# Altium PCB RF Main Board.PcbDoc
Units mil, origin at the board's own origin, x right, y up, seen from the top; angles counter-clockwise.
Board outline 5807 x 3532 mil, 2 copper layers (Top Layer, Bottom Layer); 30 components, 51 nets, 181 pads, 0 vias.
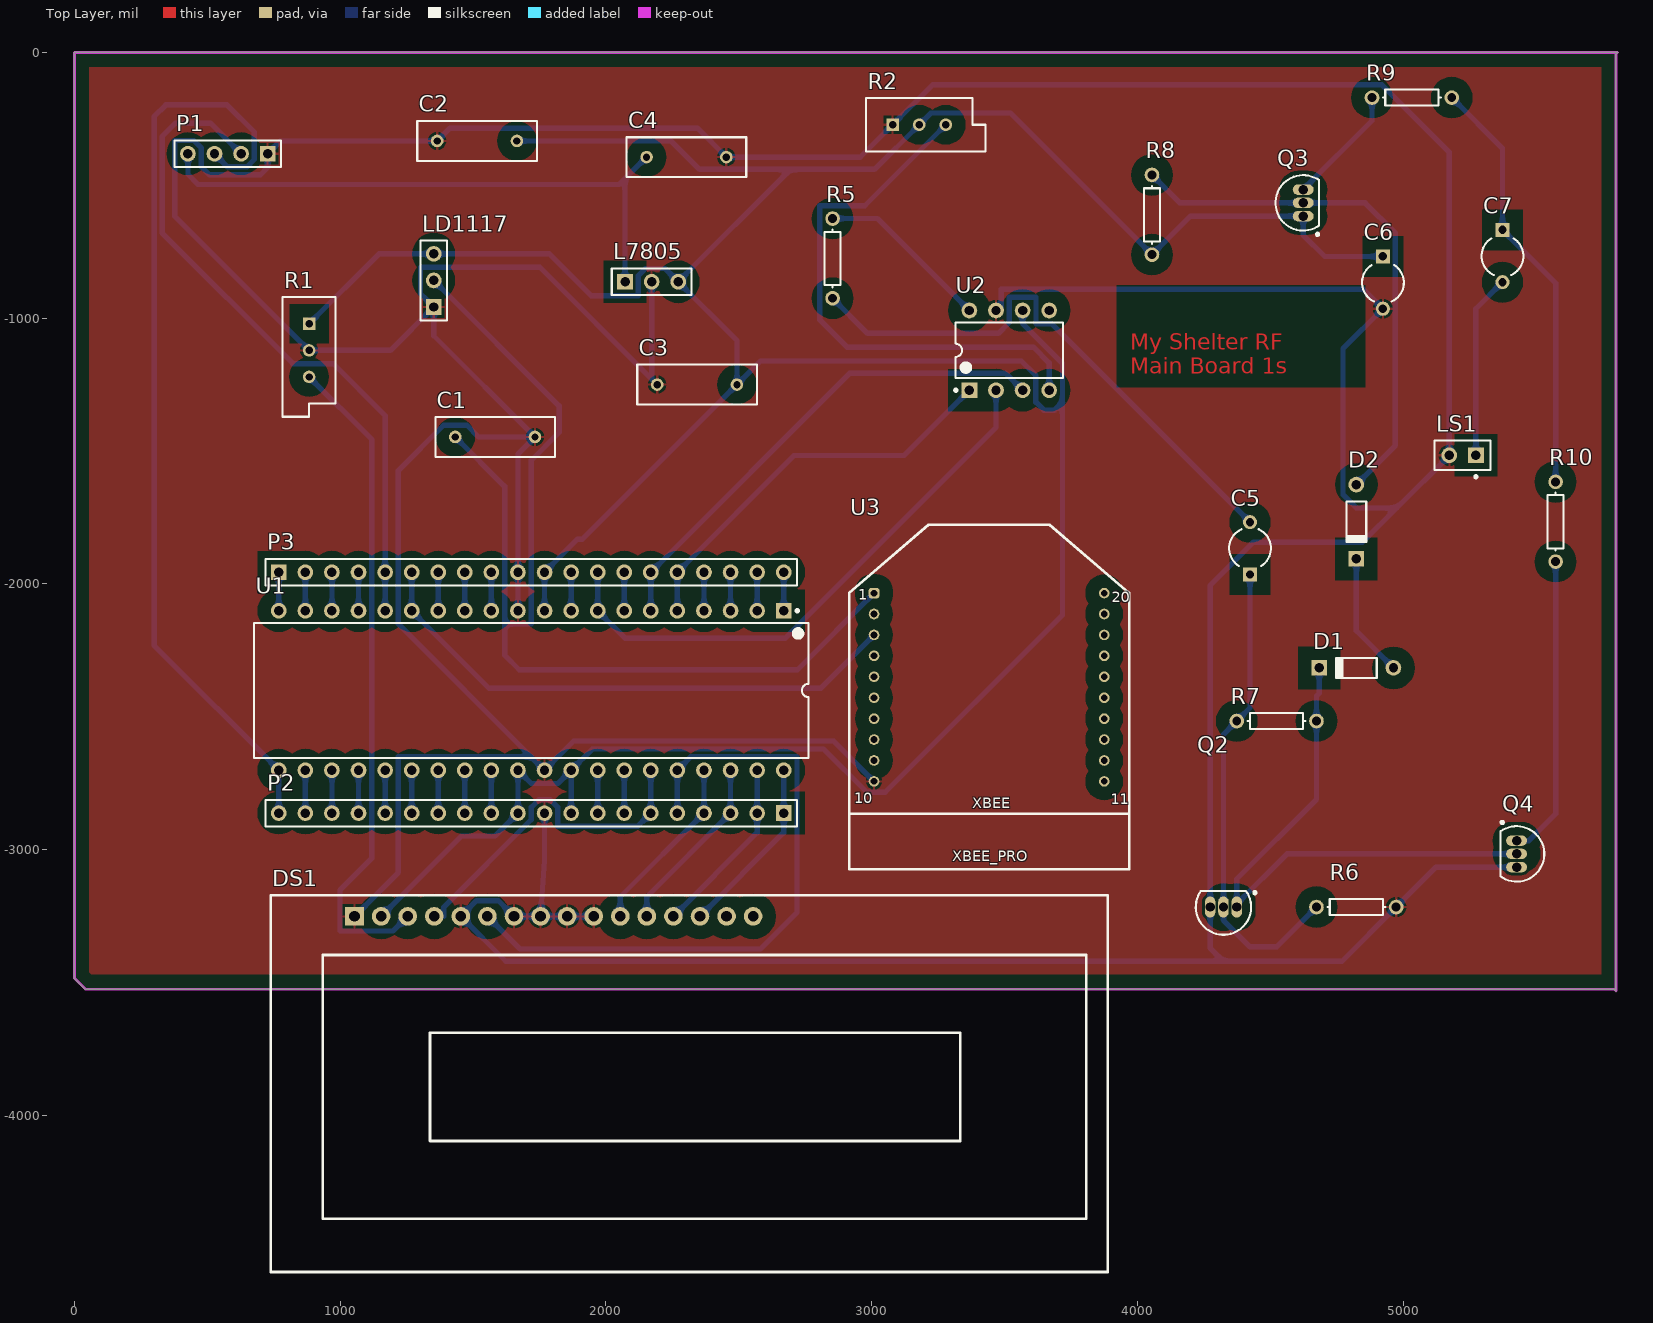
[diagram p0: Top Layer view]
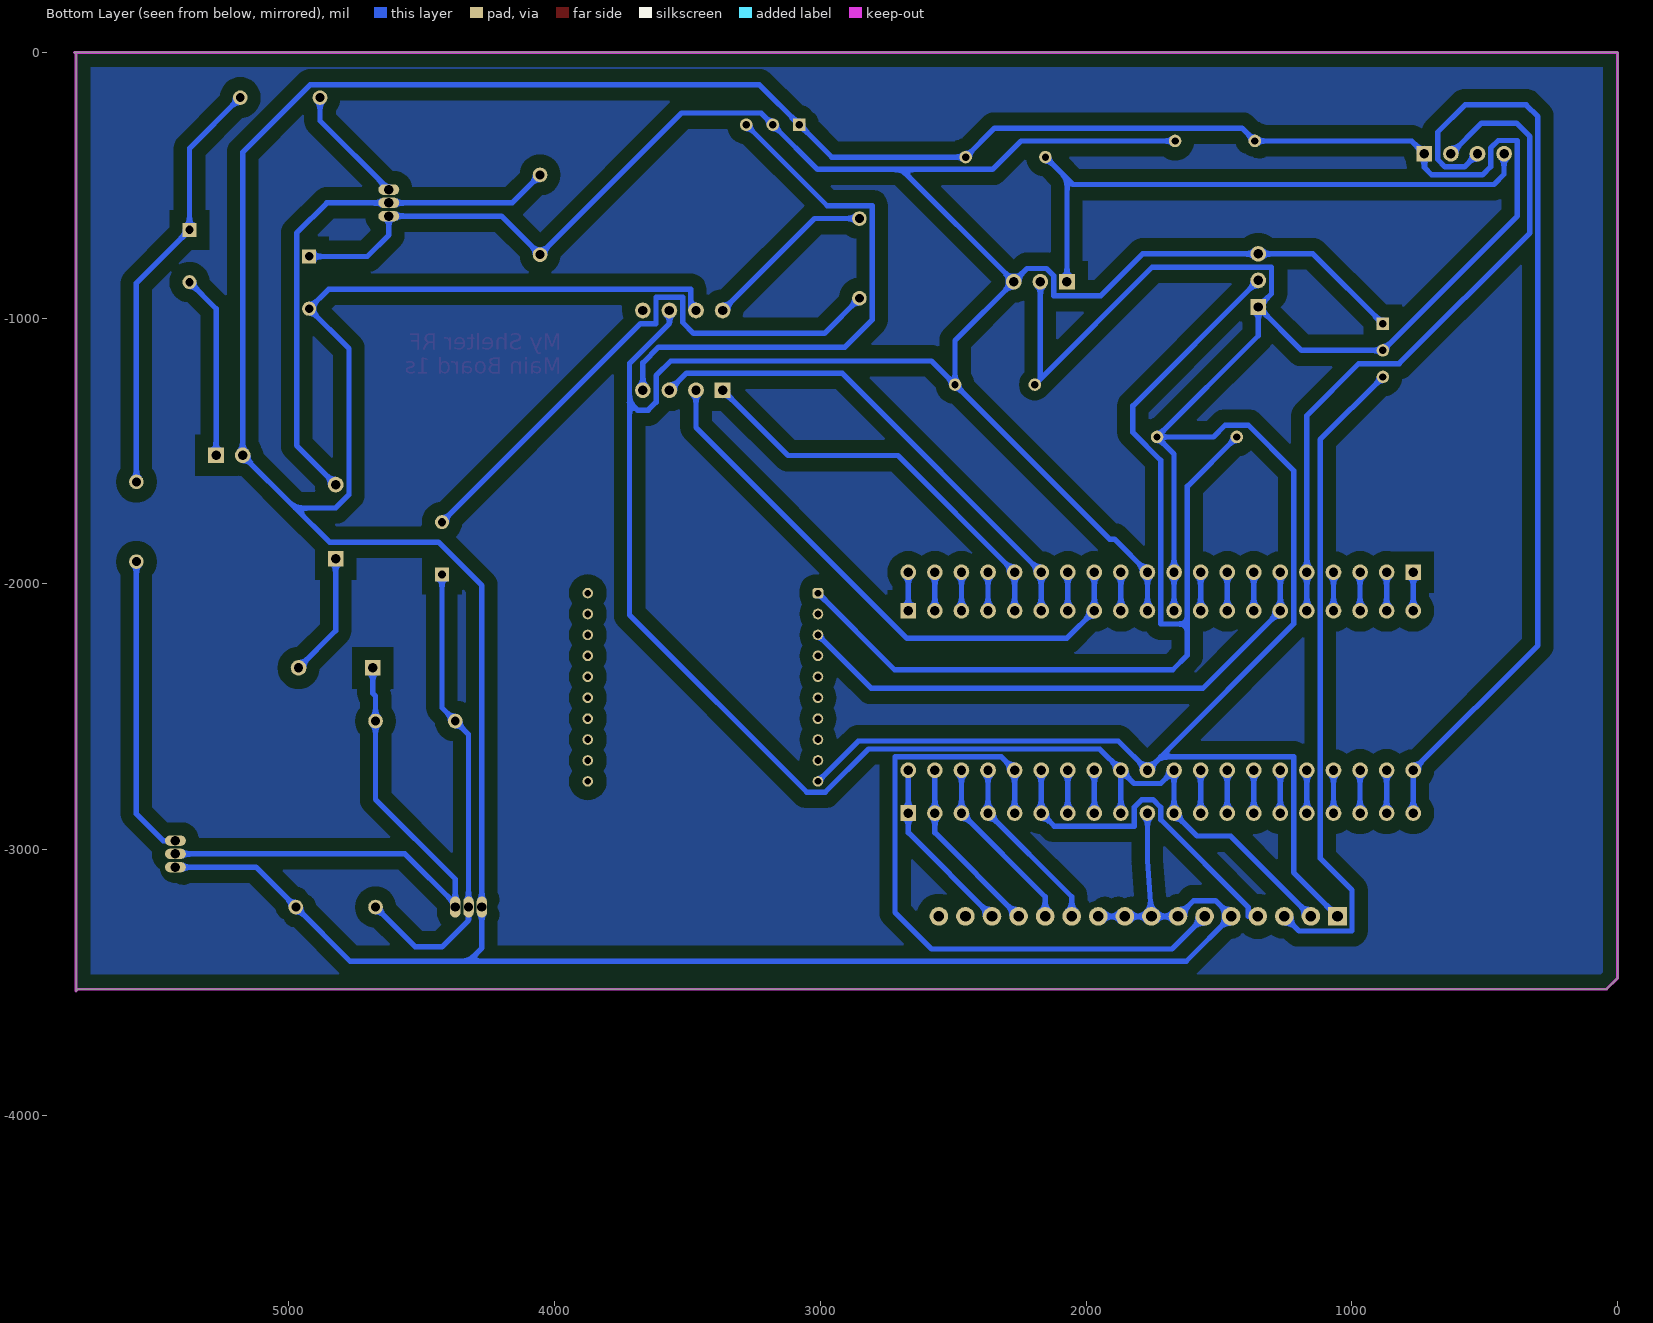
[diagram p1: Bottom Layer view, seen from below]

## Layer stack, top to bottom
Top Solder: solder mask 0.4, Solder Resist, Dk 3.5
Top Layer: signal copper 1.4
Dielectric 1: dielectric 12.6, FR-4, Dk 4.8
Bottom Layer: signal copper 1.4
Bottom Solder: solder mask 0.4, Solder Resist, Dk 3.5

## Board outline
41,-3525 0,-3484 0,0 5807,0 5801,-6 5801,-3532 5794,-3525

## Design rules (kind name [scope] priority, off if disabled: settings)
Clearance Clearance_1 [InPolygon] p1: gap=50
Clearance [All] p2: gap=10
PolygonConnect [All] p1: connectstyle=Relief reliefconductorwidth=10 reliefentries=4 polygonreliefangle="90 Angle" airgapwidth=10
RoutingLayers [All] p1: top layer_v5=FALSE bottom layer_v5=TRUE
RoutingVias [All] p1: holewidth=28 width=50 viastyle="Through Hole" minholewidth=28 minwidth=50 maxholewidth=28 maxwidth=50
SolderMaskExpansion [All] p1: expansion=4
Width [All] p1: maxlimit=20 minlimit=20 preferedwidth=20
29 further rules are at their usual default settings.

## Components (designator, comment, footprint, x,y, rotation, side; value= is the part's Value field where it differs from the comment)
C1 "" RAD-0.3 1583,-1447 r180 top
C2 "Cap" RAD-0.3 1515,-333 r0 top
C3 "Cap" RAD-0.3 2343,-1250 r0 top
C4 "Cap" RAD-0.3 2303,-394 r180 top
C5 "Cap Pol1" CAPR5-4X5 4424,-1866 r90 top
C6 "Cap Pol1" CAPR5-4X5 4924,-866 r270 top
C7 "Cap Pol1" CAPR5-4X5 5374,-766 r270 top
D1 "1N4148" DO-35 4824,-2316 r180 top
D2 "1N4148" DO-35 4824,-1766 r270 top
DS1 "LCD 44780" "OLED 16x2" 1054,-3251 r0 top
L7805 "Volt Reg" HDR1X3 2072,-863 r0 top
LD1117 "Volt Reg" HDR1X3 1352,-958 r90 top
LS1 "Speaker" PIN2 5274,-1516 r180 top
P1 "Header 4" HDR1X4 727,-381 r180 top
P2 "Header 20" HDR1X20 2669,-2862.42 r180 top
P3 "Header 20" HDR1X20 769,-1956 r0 top
Q2 "2N2222" TO-226-AA 4324,-3216 r90 top
Q3 "2N2222" TO-226-AA 4624,-566 r0 top
Q4 "2N2907" TO-226-AA 5427,-3016 r180 top
R1 "RPot" VR5 883,-1121 r270 top
R2 "RPot" VR5 3179,-272 r0 top
R5 "Res1" AXIAL-0.3 2853,-775 r270 top
R6 "Res1" AXIAL-0.3 4824,-3216 r0 top
R7 "Res1" AXIAL-0.3 4524,-2516 r180 top
R8 "Res1" AXIAL-0.3 4055,-611 r270 top
R9 "Res1" AXIAL-0.3 5033,-170 r0 top
R10 "" AXIAL-0.3 5574,-1766 r90 top
U1 "ATmega644PA-PU" 40P6 1719,-2401 r270 top
U2 "LT1661" DIP-8 3518,-1121 r90 top
U3 "XBEE" XBEE/PRO 2974,-1602.42 r0 top

## Footprints (in the part's own frame and the unit in brackets; to place one, negate y for a bottom-side part, rotate by r counter-clockwise, add the part's x,y. Pads: shape width x height; smd on the part's side, far side on the other; paste and mask are expansions set on the pad)
40P6 [mm] "40-Pin Ceramic Dual In-Line Package (CerDIP)"
  rect 1.5x1.5 hole 0.9: 1(-7.62,24.13)
  round 1.5 hole 0.9: 2(-7.62,21.59) 3(-7.62,19.05) 4(-7.62,16.51) 5(-7.62,13.97) 6(-7.62,11.43) 7(-7.62,8.89) 8(-7.62,6.35) 9(-7.62,3.81) 10(-7.62,1.27) 11(-7.62,-1.27) 12(-7.62,-3.81) 13(-7.62,-6.35) 14(-7.62,-8.89) 15(-7.62,-11.43) 16(-7.62,-13.97) 17(-7.62,-16.51) 18(-7.62,-19.05) 19(-7.62,-21.59) 20(-7.62,-24.13) 21(7.62,-24.13) 22(7.62,-21.59) 23(7.62,-19.05) 24(7.62,-16.51) 25(7.62,-13.97) 26(7.62,-11.43) 27(7.62,-8.89) 28(7.62,-6.35) 29(7.62,-3.81) 30(7.62,-1.27) 31(7.62,1.27) 32(7.62,3.81) 33(7.62,6.35) 34(7.62,8.89) 35(7.62,11.43) 36(7.62,13.97) 37(7.62,16.51) 38(7.62,19.05) 39(7.62,21.59) 40(7.62,24.13)
  silkscreen extent -7.74,-26.5 6.45,26.5, body extent -7.05,-26.47 7.05,26.47, height 4.83
AXIAL-0.3 [mm] "Axial Device, Thru-Hole; 2 Leads; 0.3 in Pin Spacing"
  round 1.4 hole 0.85: 1(-3.81,0) 2(3.81,0)
  silkscreen extent -2.77,-0.76 2.77,0.76
CAPR5-4X5 [mm] "Capacitor; 2 Leads"
  rect 1.35x1.35 hole 0.8: 1(-2.5,0)
  round 1.35 hole 0.8: 2(2.5,0)
  silkscreen extent -1.69,-2 1.82,2
DIP-8 [mm]
  rect 1.5x1.5 hole 0.9: 1(-3.81,3.81)
  round 1.5 hole 0.9: 2(-3.81,1.27) 3(-3.81,-1.27) 4(-3.81,-3.81) 5(3.81,-3.81) 6(3.81,-1.27) 7(3.81,1.27) 8(3.81,3.81)
  silkscreen extent -3.93,-5.15 2.65,5.23, body extent -3.6,-5.15 3.6,5.15, height 5.08
DO-35 [mm] "Diode, Axial; Body 3.8 x 1.9 mm (LxDia. max), Lead Dia. 0.53 mm (max)"
  round 1.5 hole 0.9: 1(-3.55,0)
  rect 1.5x1.5 hole 0.9: 2(3.55,0)
  silkscreen extent -1.95,-0.95 2.05,0.95
HDR1X3 [mm] "Connector; Header; 3 Position"
  rect 1.5x1.5 hole 0.9: 1(0,0)
  round 1.5 hole 0.9: 2(2.54,0) 3(5.08,0)
  silkscreen extent -1.27,-1.27 6.35,1.27
HDR1X4 [mm] "Connector; Header; 4 Position"
  rect 1.5x1.5 hole 0.9: 1(0,0)
  round 1.5 hole 0.9: 2(2.54,0) 3(5.08,0) 4(7.62,0)
  silkscreen extent -1.27,-1.27 8.89,1.27
HDR1X20 [mm] "Connector; Header; 20 Position"
  rect 1.5x1.5 hole 0.9: 1(0,0)
  round 1.5 hole 0.9: 2(2.54,0) 3(5.08,0) 4(7.62,0) 5(10.16,0) 6(12.7,0) 7(15.24,0) 8(17.78,0) 9(20.32,0) 10(22.86,0) 11(25.4,0) 12(27.94,0) 13(30.48,0) 14(33.02,0) 15(35.56,0) 16(38.1,0) 17(40.64,0) 18(43.18,0) 19(45.72,0) 20(48.26,0)
  silkscreen extent -1.27,-1.27 49.53,1.27
"OLED 16x2" [mil]
  rect 70x70 hole 40: 1(0,0)
  round 70 hole 40: 2(100,0) 3(200,0) 4(300,0) 5(400,0) 6(500,0) 7(600,0) 8(700,0) 9(800,0) 10(900,0) 11(1000,0) 12(1100,0) 13(1200,0) 14(1300,0) 15(1400,0) 16(1500,0)
  silkscreen extent -315,-1339 2835,79
PIN2 [mm] "Photosensitive Diode; 2 Leads"
  rect 1.5x1.5 hole 0.9: 1(0,0)
  round 1.5 hole 0.9: 2(2.54,0)
  silkscreen extent -1.4,-1.4 3.94,2.17
RAD-0.3 [mm] "Radial Cap, Thru-Hole; 2 Leads; 0.3 in Pin Spacing"
  round 1.2 hole 0.7: 1(-3.81,0) 2(3.81,0)
  silkscreen extent -5.71,-1.91 5.71,1.91
TO-226-AA [mm] "TO, Flat Index; 3 In-Line, Axial Leads; Body Dia. 4.8mm; Leads 0.55 x 0.51 mm (max)"
  oval 2x1 hole 0.9: 1(0,-1.27) 2(0,0) 3(0,1.27)
  silkscreen extent -2.65,-3.13 1.52,2.65, body extent -2.65,-2.66 1.52,2.66, height 5.33
VR5 [mm] "Thru-Hole; 3 Leads"
  rect 1.2x1.2 hole 0.7: 1(-2.54,0)
  round 1.2 hole 0.7: 2(0,0) 3(2.54,0)
  silkscreen extent -5.08,-2.54 6.35,2.54
XBEE/PRO [mil]
  rrect50% 40x40 hole 25: 1(35,-432.09)
  round 40 hole 25: 2(35,-510.83) 3(35,-589.57) 4(35,-668.31) 5(35,-747.05) 6(35,-825.79) 7(35,-904.53) 8(35,-983.27) 9(35,-1062.01) 10(35,-1140.75) 11(901.14,-1140.75) 12(901.14,-1062.01) 13(901.14,-983.27) 14(901.14,-904.53) 15(901.14,-825.79) 16(901.14,-747.05) 17(901.14,-668.31) 18(901.14,-589.57) 19(901.14,-510.83) 20(901.14,-432.09)
  silkscreen extent -59,-1472 995,-175

## Part data
C1: library part Cap, "Capacitor"
C2 C3 C4: "Capacitor"
C5 C6 C7: "Polarized Capacitor (Radial)"
D1 D2: library part "Diode 1N4148", "High Conductance Fast Diode"
L7805 LD1117: "Voltage Regulator"
LS1: "Loudspeaker"
P1: "Header, 4-Pin"
P2 P3: "Header, 20-Pin"
Q2 Q3: library part NPN, "NPN Bipolar Transistor"
Q4: library part PNP, "PNP Bipolar Transistor"
R1 R2: "Potentiometer"
R5 R6 R7 R8 R9: "Resistor"
R10: library part Res1, "Resistor"
U1: "8-bit AVR Microcontroller, 64KB Flash, 2KB EEPROM, 4KB SRAM, 40-pin PDIP, Industrial Grade (-40°C to 85°C)"

## Nets (pads, with @x,y where several pads share a name; then routed paths per layer and width w, separated by ;. In a path a pad name is that pad's centre, name@x,y a point inside that pad or via, vN(x,y) a via of type N, cw(c..) or ccw(c..) an arc to the next point about the centre after c; other vN are vias at no path point)
3.3V: C1.2 LD1117.2 U3.1 | length 4062.3
  Bottom Layer w20: LD1117.2 1824,-1330 1824,-1430 1719,-1535 1719,-2151 1619,-2151 ; C1.2 1619,-1633 1619,-2151 ; U3.1 2720.5,-2323 1674,-2323 1619,-2268 1619,-2151
"125K HZ": P1.3 P2.20 U1.21 | length 3537.8
  Bottom Layer w20: P1.3 576.53,-430.53 649,-430.53 676.53,-403 676.53,-299.53 574,-197 344,-197 300,-241 300,-2232 U1.21 P2.20
AREF: C2.2 C3.2 C6.1 DS1.2 L7805.3 LD1117.3 P2.9 P2.11 P3.11 Q3.1 R1.1 R2.2 R8.2 U1.10 U1.30 U1.32 U2.6 | length 13769.3
  Bottom Layer w20: R1.1 1146,-758 LD1117.3 1787,-758 1945,-916 2122,-916 2122,-840 2149,-813 2222,-813 L7805.3 ; DS1.2 1456,-2949 1582.42,-2949 P2.11 U1.30 1719,-2751 1819,-2751 U1.32 ; C2.2 2245,-333 2352,-440 2695,-440 ; U1.10 P3.11 1893.43,-1831.57 1911.43,-1831.57 C3.2 ; P2.9 U1.32 ; U2.6 3568,-1020 3718,-1170 3718,-1316 ; C6.1 4705,-767.57 4624,-686.57 Q3.1 4200,-616 R8.2 3522,-228 3223,-228 R2.2 3011,-440 2695,-440 ; U1.32 1949,-2621 2819,-2621 2982,-2784 3051,-2784 3718,-2117 3718,-1316 ; L7805.3 2695,-440 ; L7805.3 2493,-1084 C3.2 ; C3.2 2582,-1161 3563,-1161 3618,-1216 3618,-1316 3648,-1346 3688,-1346 3718,-1316
"AUDIO IN": R5.1 U2.8 | length 658.3
  Bottom Layer w20: R5.1 3022,-625 U2.8
GND: C1.1 C2.1 C3.1 C4.1 C6.2 DS1.1 DS1.5 DS1.7 DS1.8 DS1.9 DS1.10 L7805.2 LD1117.1 LS1.2 P1.1 P2.10 P3.10 Q2.3 Q4.3 R1.2 R2.1 R6.2 U1.11 U1.31 U2.7 U3.10 | length 25550.3
  Bottom Layer w20: DS1.1 1219,-3086 1219,-2651 1719,-2651 ; U1.11 P3.10 1669,-1511 C1.1 ; P2.10 1769,-3042 DS1.8 ; DS1.10 DS1.9 DS1.8 ; L7805.2 2172,-1229 ; C3.1 2172,-1229 ; U3.10 2856.83,-2591 1879,-2591 U1.31 1719,-2651 ; U2.7 3488,-951 3488,-891.47 4851.05,-891.47 C6.2 4774,-1114.43 4774,-1664 4824,-1714 4976,-1714 ; Q4.3 5124,-3066 R6.2 4770,-3420 4324,-3420 ; LD1117.1 1352,-1066 C1.1 ; LD1117.1 1302,-908 1302,-808 1751,-808 2172,-1229 ; LD1117.1 1189,-1121 R1.2 377,-615 377,-331.47 449,-331.47 477.47,-359.94 477.47,-430 508,-460.53 699,-460.53 727,-432.53 P1.1 775,-333 C2.1 1413,-285 2344,-285 C4.1 2957,-394 R2.1 3229,-122 4920,-122 5174,-376 LS1.2 4976,-1714 ; 1719,-2651 1219,-2151 1219,-1573 1389,-1403 1477,-1403 1521,-1447 C1.1 ; DS1.8 DS1.7 1595,-3192 1513,-3192 DS1.5 1623,-3420 4324,-3420 ; 4324,-3420 4274,-3370 Q2.3 4274,-2006 4437,-1843 4847,-1843 4976,-1714
INT0: P1.2 P3.5 U1.16 | length 2586.9
  Bottom Layer w20: P1.2 512,-266 380,-266 330,-316 330,-679 822,-1171 974,-1171 1169,-1366 P3.5 U1.16
MOSI: P3.15 U1.6 U2.3 | length 1880.8
  Bottom Layer w20: U1.6 P3.15 2918,-1207 3504,-1207 U2.3
NetC5_1: C5.1 Q2.2 R6.1 R7.2 | length 1796.5
  Bottom Layer w20: C5.1 4424,-2466 R7.2 4324,-2566 Q2.2 4324,-3266 4424,-3366 4524,-3366 R6.1
NetC5_2: C5.2 R5.2 | length 2145.7
  Bottom Layer w20: R5.2 2985,-1057 3477,-1057 3518,-1016 3518,-921.47 3618.47,-921.47 3618.47,-1020.53 3676.95,-1020.53 C5.2
NetC7_1: C7.1 R9.2 R10.2 | length 1608
  Bottom Layer w20: R9.2 5374,-361 C7.1 5574,-867.57 R10.2
NetC7_2: C7.2 LS1.1 | length 693
  Bottom Layer w20: LS1.1 5274,-964.43 C7.2
NetD1_1: D1.1 D2.2 | length 468.1
  Bottom Layer w20: D2.2 4824,-2176.24 D1.1
NetD1_2: D1.2 Q2.1 Q4.2 R7.1 | length 2159.8
  Bottom Layer w20: Q2.1 Q2.1@4374,-3205 ; D1.2 4684.24,-2411.76 4674,-2422 R7.1 4674,-2811 4374,-3111 Q2.1@4374,-3205 ; Q4.2 4563,-3016 Q2.1@4374,-3205
NetD2_1: D2.1 Q3.2 R8.1 | length 2013.8
  Bottom Layer w20: R8.1 4160,-566 Q3.2 4857,-566 4971,-680 4971,-1479.24 D2.1
NetDS1_3: DS1.3 R1.3 | length 2510.2
  Bottom Layer w20: R1.3 1119,-1457 1119,-3032 999,-3152 999,-3306 1199,-3306 DS1.3
NetP2_7: P2.7 U1.34 | length 161.4
  Bottom Layer w20: P2.7 U1.34
NetP2_8: P2.8 U1.33 | length 161.4
  Bottom Layer w20: P2.8 U1.33
NetP2_17: P2.17 U1.24 | length 161.4
  Bottom Layer w20: P2.17 U1.24
NetP2_18: P2.18 U1.23 | length 161.4
  Bottom Layer w20: P2.18 U1.23
NetP2_19: P2.19 U1.22 | length 161.4
  Bottom Layer w20: P2.19 U1.22
NetP3_1: P3.1 U1.20 | length 145
  Bottom Layer w20: U1.20 P3.1
NetP3_2: P3.2 U1.19 | length 145
  Bottom Layer w20: U1.19 P3.2
NetP3_3: P3.3 U1.18 | length 145
  Bottom Layer w20: U1.18 P3.3
NetP3_4: P3.4 U1.17 | length 145
  Bottom Layer w20: U1.17 P3.4
NetP3_14: P3.14 U1.7 | length 145
  Bottom Layer w20: U1.7 P3.14
NetP3_17: P3.17 U1.4 | length 145
  Bottom Layer w20: U1.4 P3.17
NetP3_18: P3.18 U1.3 | length 145
  Bottom Layer w20: U1.3 P3.18
NetP3_19: P3.19 U1.2 | length 145
  Bottom Layer w20: U1.2 P3.19
NetP3_20: P3.20 U1.1 | length 145
  Bottom Layer w20: U1.1 P3.20
NetQ3_3: Q3.3 R9.1 | length 453.3
  Bottom Layer w20: Q3.3 4883,-257 R9.1
NetQ4_1: Q4.1 R10.1 | length 1138.4
  Bottom Layer w20: Q4.1 5474,-2966 5574,-2866 R10.1
NetR2_3: R2.3 U2.4 | length 2063
  Bottom Layer w20: R2.3 2974,-577 2805,-577 2805,-1007 2907,-1109 3609,-1109 3668,-1168 U2.4
PA0: DS1.14 P2.1 U1.40 | length 680.5
  Bottom Layer w20: DS1.14 2669,-2936 P2.1 U1.40
PA1: DS1.13 P2.2 U1.39 | length 680.5
  Bottom Layer w20: DS1.13 2569,-2936 P2.2 U1.39
PA2: DS1.12 P2.3 U1.38 | length 680.5
  Bottom Layer w20: DS1.12 2154,-3177.42 P2.3 U1.38
PA3: DS1.11 P2.4 U1.37 | length 680.5
  Bottom Layer w20: DS1.11 2054,-3177.42 P2.4 U1.37
PA4: DS1.6 P2.5 U1.36 | length 2490.4
  Bottom Layer w20: DS1.6 1677,-3374 2581.33,-3374 2719,-3236.33 2719,-2651 2319,-2651 U1.36 P2.5
PA5: DS1.4 P2.6 U1.35 | length 1309.3
  Bottom Layer w20: DS1.4 1390,-3251 1390,-3216 1719,-2887 1719,-2841 1748,-2812 1790,-2812 1819,-2841 1819,-2912 2119.42,-2912 P2.6 U1.35
PC3: P2.16 U1.25 | length 161.4
  Bottom Layer w20: P2.16 U1.25
PC4: P2.15 U1.26 | length 161.4
  Bottom Layer w20: P2.15 U1.26
PC5: P2.14 U1.27 | length 161.4
  Bottom Layer w20: P2.14 U1.27
PC6: P2.13 U1.28 | length 161.4
  Bottom Layer w20: P2.13 U1.28
PC7: P2.12 U1.29 | length 161.4
  Bottom Layer w20: P2.12 U1.29
RESET: P3.12 U1.9 | length 145
  Bottom Layer w20: U1.9 P3.12
RXD0: P3.7 U1.14 | length 145
  Bottom Layer w20: U1.14 P3.7
SCK: P3.13 U1.8 U2.2 | length 2156
  Bottom Layer w20: P3.13 U1.8 2073,-2205 2674,-2205 3468,-1411 U2.2
SS: P3.16 U1.5 U2.1 | length 1527.7
  Bottom Layer w20: U1.5 P3.16 2708,-1517 3122,-1517 U2.1
TXD0: P3.6 U1.15 U3.3 | length 2089.2
  Bottom Layer w20: P3.6 U1.15 1561,-2393 2807.98,-2393 U3.3
VIN: C4.2 L7805.1 P1.4 | length 2250.1
  Bottom Layer w20: P1.4 427,-458.44 465.56,-497 2050,-497 2072,-475 ; L7805.1 2072,-475 ; C4.2 2072,-475
XTAL1: P3.8 U1.13 | length 145
  Bottom Layer w20: U1.13 P3.8
XTAL2: P3.9 U1.12 | length 145
  Bottom Layer w20: U1.12 P3.9
pads on no net: DS1.15 DS1.16 U2.5 U3.2 U3.4 U3.5 U3.6 U3.7 U3.8 U3.9 U3.11 U3.12 U3.13 U3.14 U3.15 U3.16 U3.17 U3.18 U3.19 U3.20

## Polygon pours and split planes (outlines as drawn)
GND on Bottom Layer "GND_L02_P000" (solid, pour order 0): 0,0 5785,0 5785,-3516 5794,-3525 54,-3525 41,-3525 0,-3484 0,0
GND on Top Layer "GND_L01_P002" (solid, pour order 2): 0,0 6,-6 5801,-6 5801,-3518 5794,-3525 54,-3525 41,-3525 0,-3484 0,0

## Keep-outs
Keep-Out Layer:
  the board outline again, w10

## Other copper
Top Layer:
  text "My Shelter RF / Main Board 1s" at 3973,-1209 h60

## Text inside footprints (layer, text, board x,y; h text height)
U3: Top Overlay "XBEE_PRO" at 3304,-3044.5 h40; Top Overlay "1" at 2949,-2059.5 h40; Top Overlay "10" at 2934,-2824.5 h40; Top Overlay "11" at 3899,-2829.5 h40; Top Overlay "20" at 3904,-2069.5 h40